# Altium PCB CLK2.PcbDoc
Units mm, origin at the board's own origin, x right, y up, seen from the top; angles counter-clockwise.
Board outline 47.37 x 50.44 mm, 4 copper layers (Top Layer, Internal Plane 1, Internal Plane 2, Bottom Layer), stack 0.677 mm thick; 120 components, 85 nets, 427 pads, 486 vias.
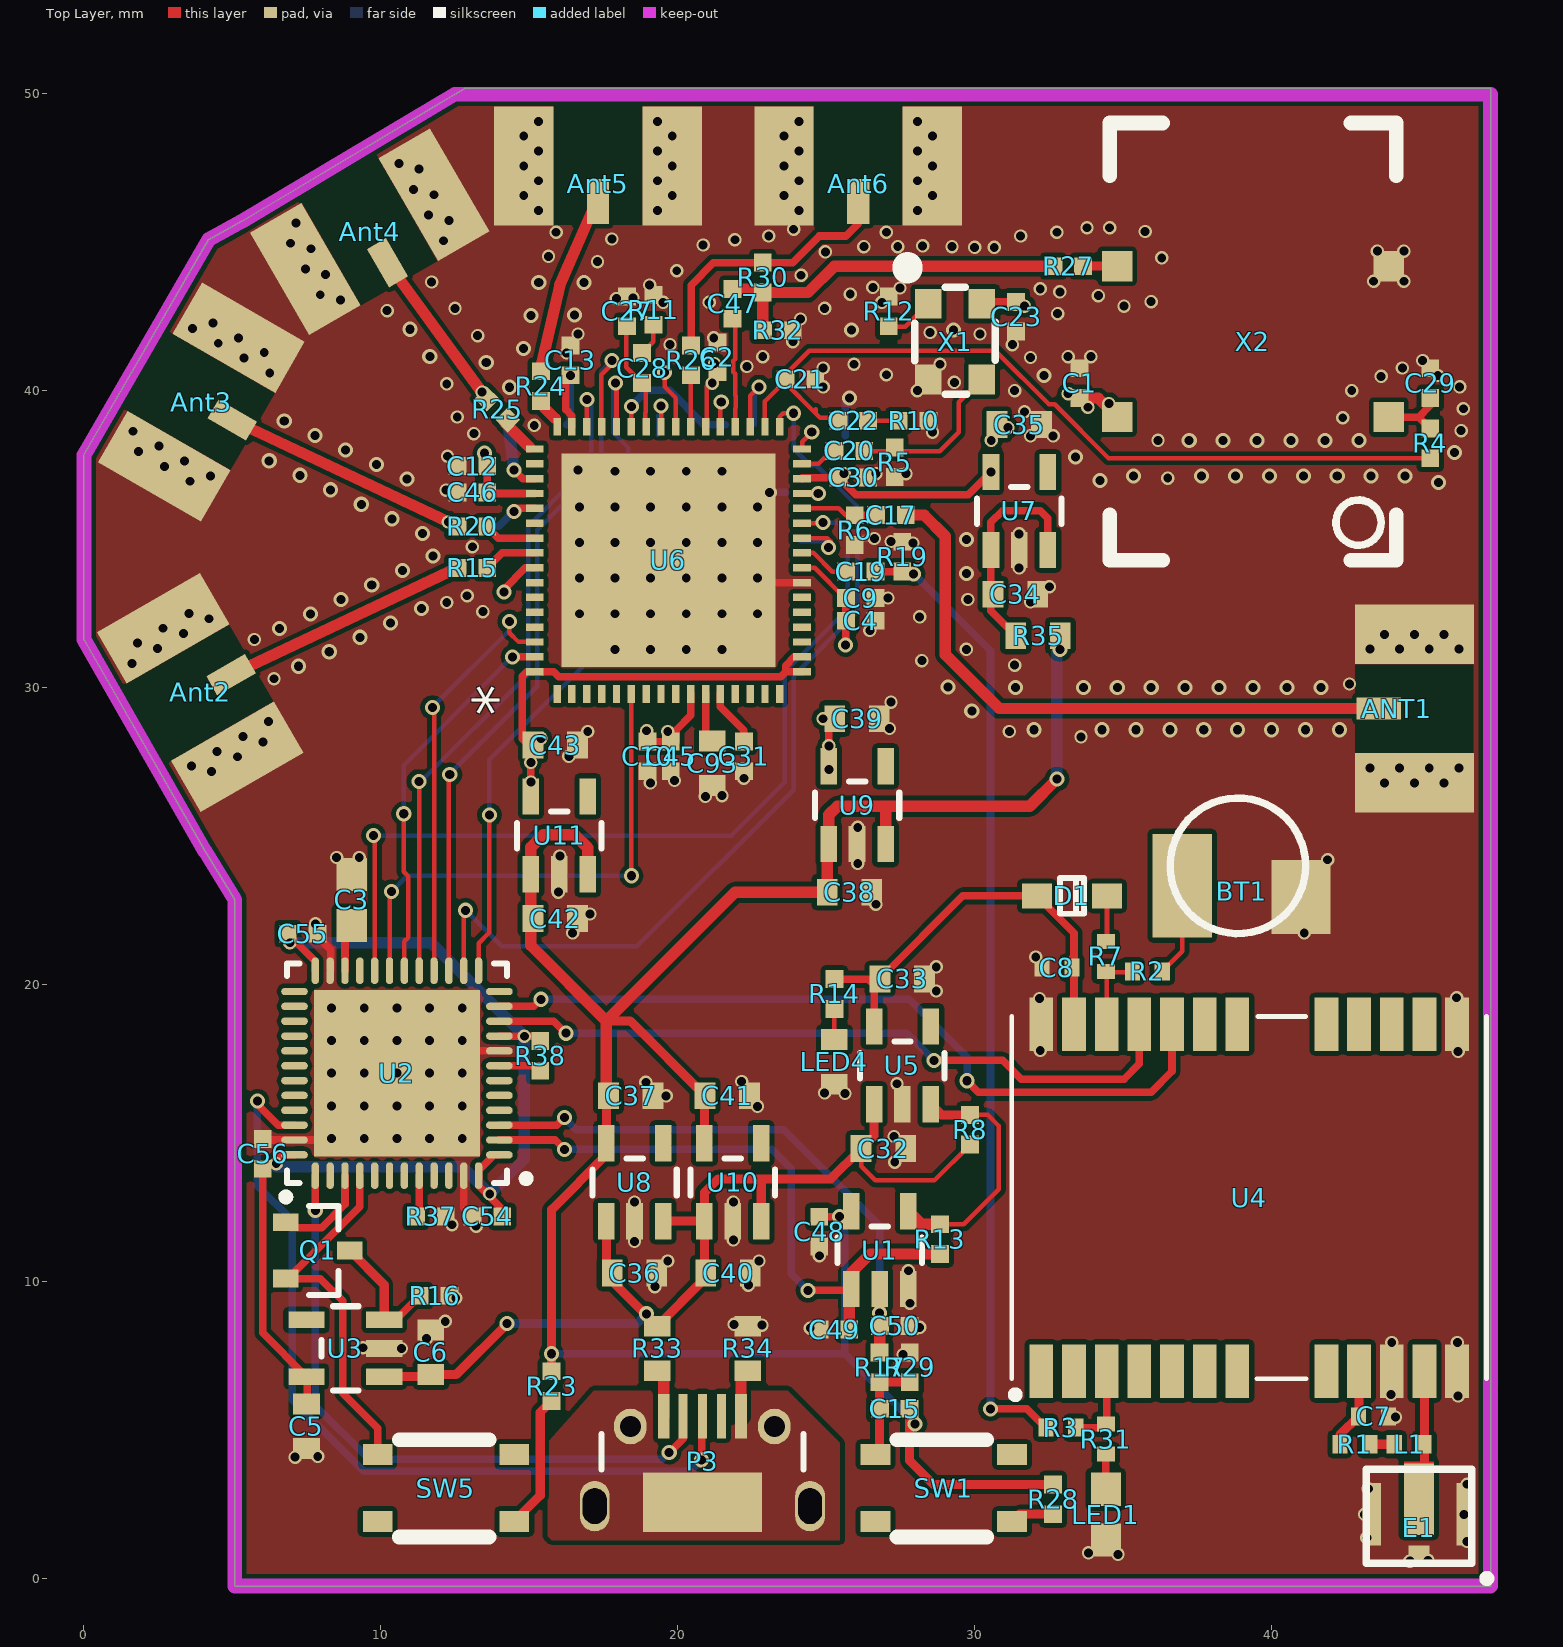
[diagram p0: Top Layer view]
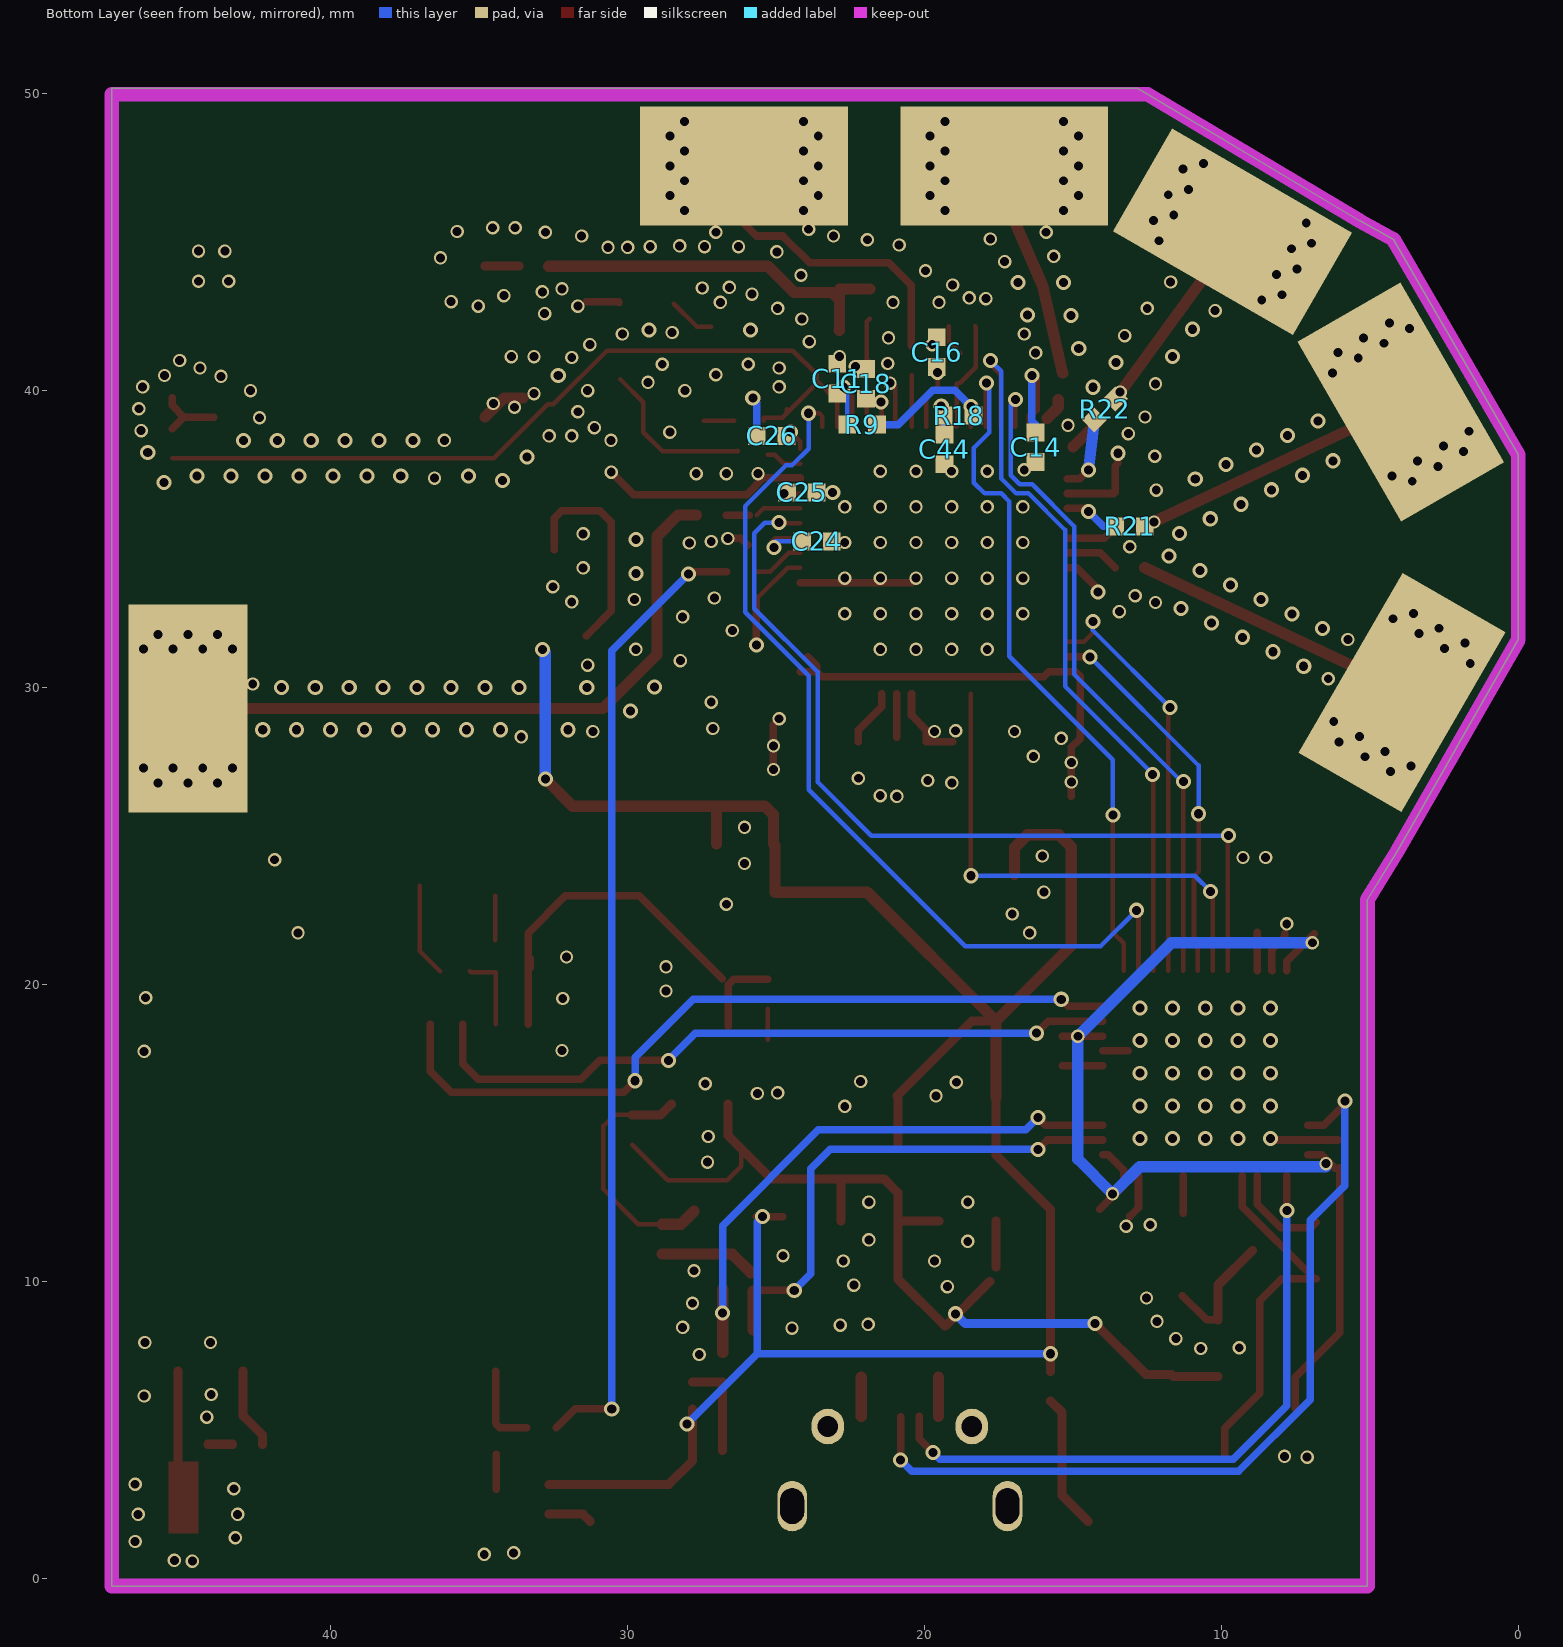
[diagram p1: Bottom Layer view, seen from below]
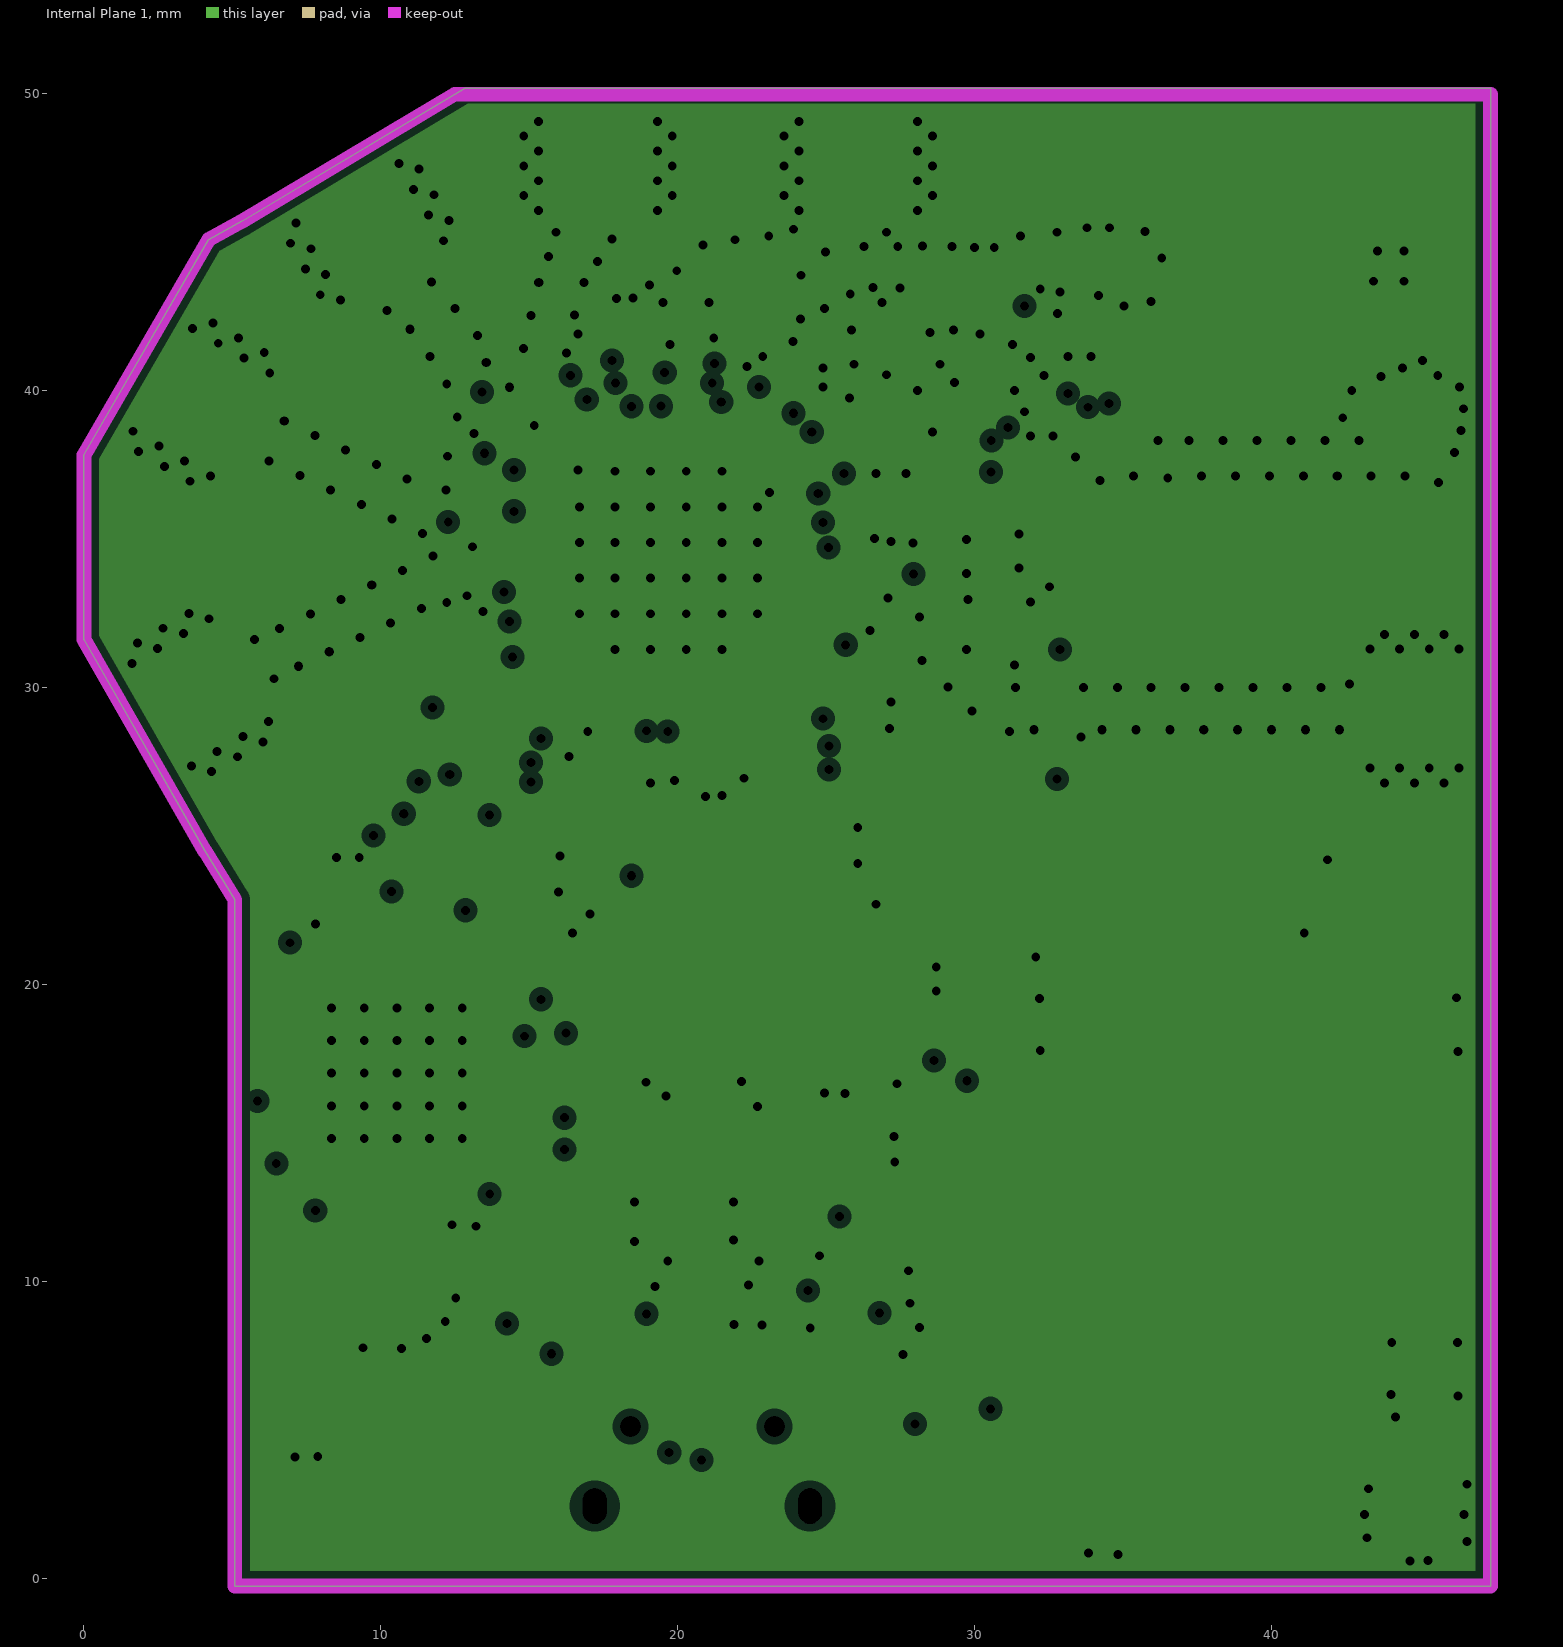
[diagram p2: Internal Plane 1, clearances drawn from the general rule]
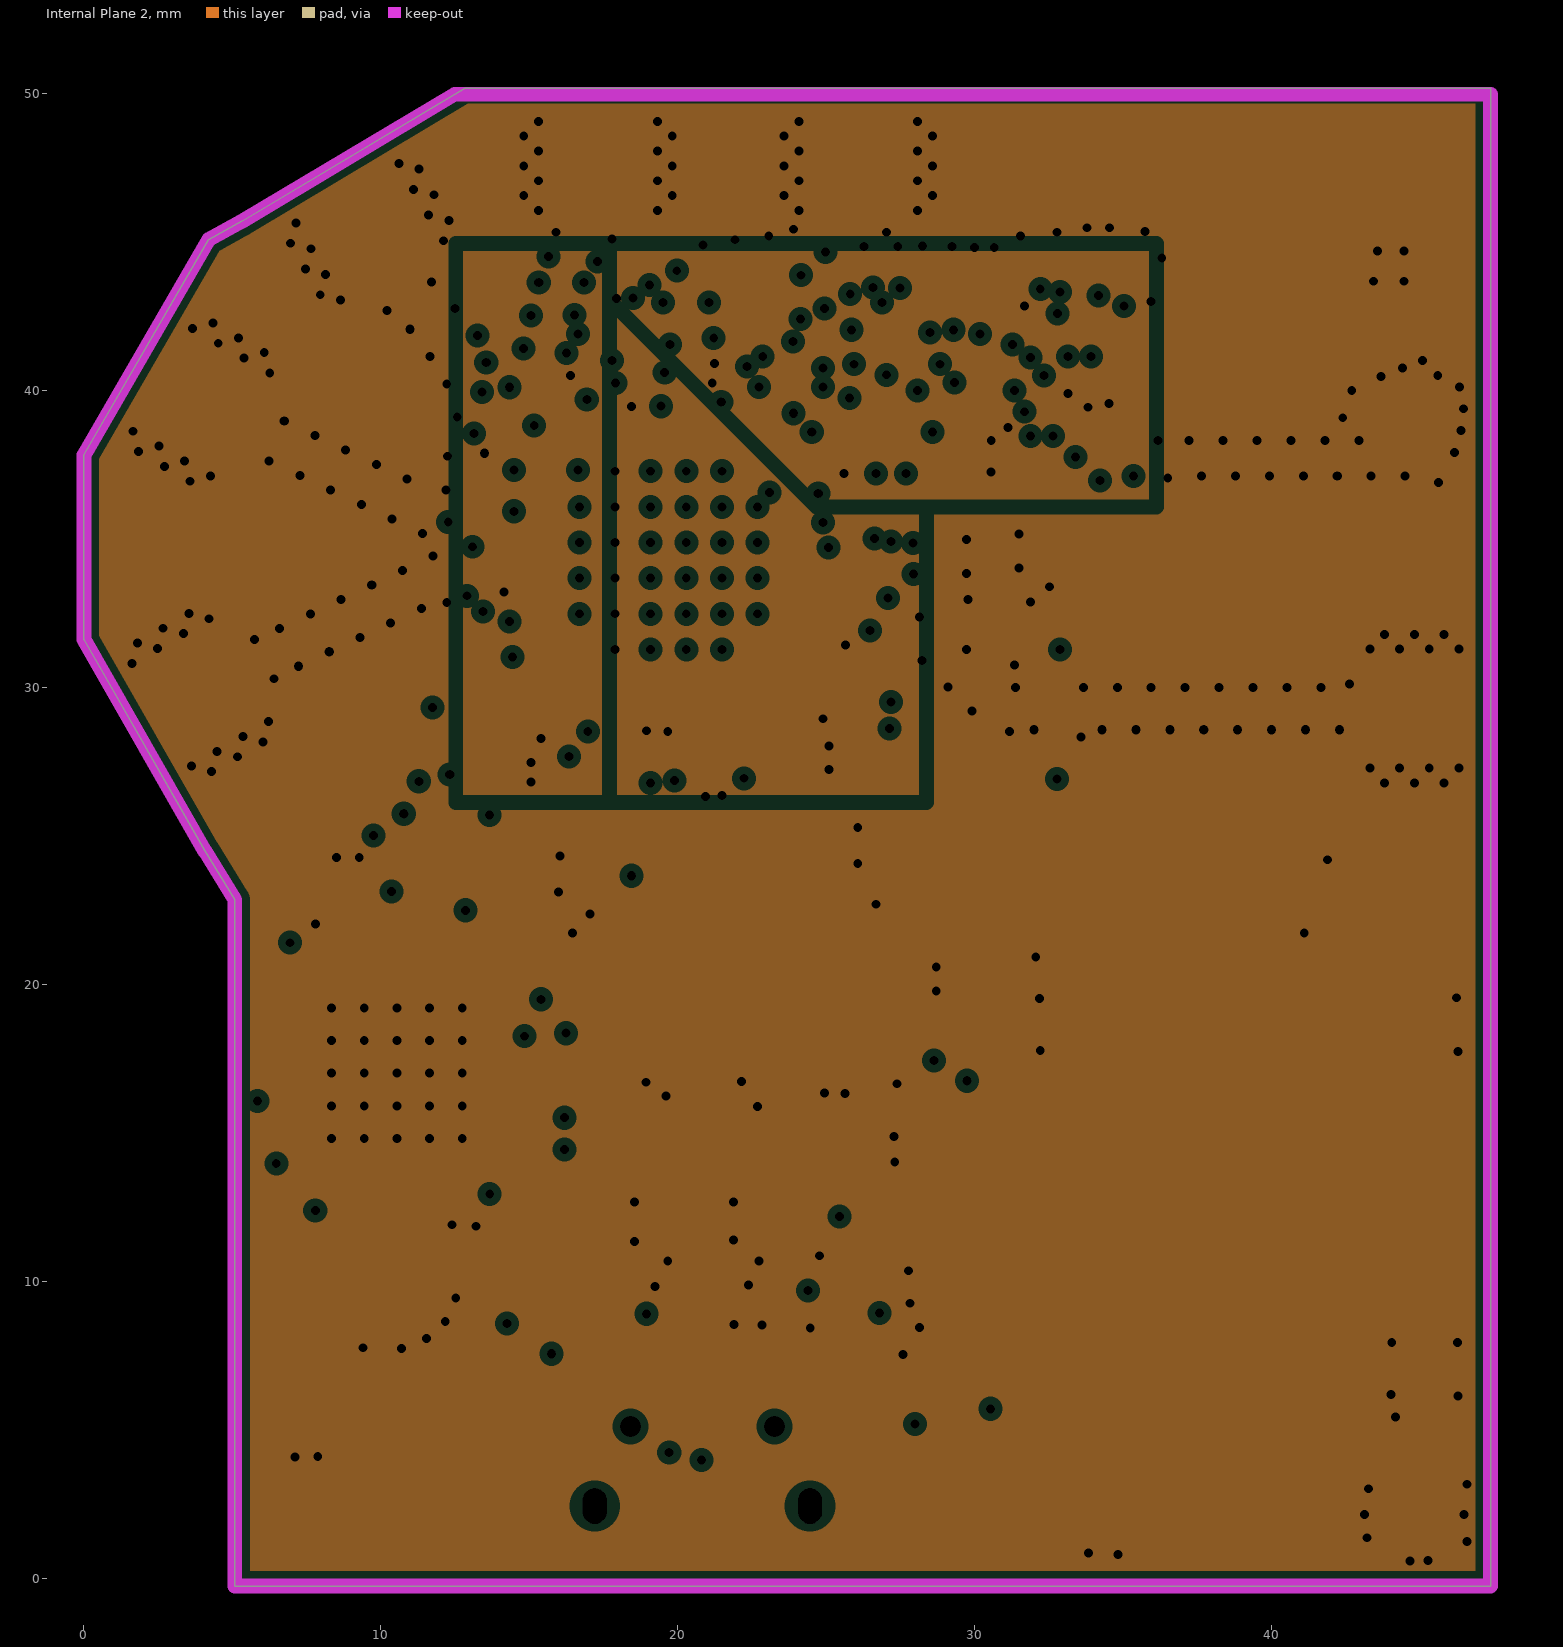
[diagram p3: Internal Plane 2, clearances drawn from the general rule]

## Layer stack, top to bottom
Top Solder: solder mask 0.0102, Solder Resist, Dk 3.5
Top Layer: signal copper 0.0356
Dielectric 1: core 0.1524, FR-4, Dk 4.2
Internal Plane 1: plane copper 0.036, net GND
Dielectric 3: core 0.254, Dk 4.2
Internal Plane 2: plane copper 0.036, net GND
Dielectric 4: prepreg 0.127, Dk 4.2
Bottom Layer: signal copper 0.0356
Bottom Solder: solder mask 0.0102, Solder Resist, Dk 3.5

## Board outline
0,31.623 0,37.846 4.191,45.085 5.334,45.72 12.828,50.19 47.371,50.19 47.371,-0.254 5.08,-0.254 5.08,22.86 4.064,24.511

## Design rules (kind name [scope] priority, off if disabled: settings)
Clearance [All] p1: gap=0.152 ignorepadtopadclearanceinfootprint=FALSE except(0: Arc-Hole Track-Hole SMDPad-Hole THPad-Hole Via-Hole Fill-Hole Poly-Hole Region-Hole Text-Hole)
DiffPairsRouting [All] p1: maxlimit=0.254 minlimit=0.254 mostfreqgap=0.254 toplayer_minwidth=0.152 toplayer_maxwidth=0.381 toplayer_prefwidth=0.381 bottomlayer_minwidth=0.152 bottomlayer_maxwidth=0.381 bottomlayer_prefwidth=0.381 maxuncoupledlength=12.7
MinimumSolderMaskSliver [All] p1 off: minsoldermaskwidth=0.254
PlaneClearance [All] p1: clearance=0.254
PlaneConnect [All] p1: planeconnectstyle=Direct reliefexpansion=0.508 reliefentries=4 reliefconductorwidth=0.254 reliefairgap=0.254
PolygonConnect [All] p1: connectstyle=Direct reliefconductorwidth=0.254 reliefentries=4 polygonreliefangle="90 Angle" airgapwidth=0.254
RoomDefinition PLL1 [InComponentClass('PLL1')] p1 off: confinementstyle=ConfineIn formatcopy=TRUE lockcomponents=FALSE outline 51.181,1.524 87.503,1.524 87.503,14.859 51.181,14.859
RoomDefinition GPS [InComponentClass('GPS')] p2 off: confinementstyle=ConfineIn formatcopy=TRUE lockcomponents=FALSE outline 51.181,1.524 75.819,1.524 75.819,8.636 51.181,8.636
RoomDefinition power [InComponentClass('power')] p3 off: confinementstyle=ConfineIn formatcopy=TRUE lockcomponents=FALSE outline 51.181,44.577 95.377,44.577 95.377,51.562 51.181,51.562
RoomDefinition mcu [InComponentClass('mcu')] p4 off: confinementstyle=ConfineIn formatcopy=TRUE lockcomponents=FALSE outline 103.886,38.1 175.26,38.1 175.26,81.788 103.886,81.788
RoutingVias [All] p1: holewidth=0.305 width=0.508 viastyle="Through Hole" minholewidth=0.305 minwidth=0.508 maxholewidth=0.711 maxwidth=1.27
SilkToBoardRegionClearance [All] p1 off:
SilkToSilkClearance [All] p1 off: silktosilkclearance=0.254
SilkToSolderMaskClearance [IsPad] p1 off: minsilkscreentomaskgap=0.254 clearancetoexposedcopper=TRUE
SolderMaskExpansion [All] p1: expansion=0.102
Width [All] p1: maxlimit=1.524 minlimit=0.152 preferedwidth=0.152
23 further rules are at their usual default settings.

## Classes and differential pairs
component class GPS: BT1 C7 C8 D1 E1 L1 LED1 R1 R2 R3 R7 R31 U4
component class mcu: C3 C54 C55 C56 P3 R33 R34 R37 R38 U2
component class power: C5 C6 C15 C32 C33 C34 C35 C36 C37 C38 C39 C40 C41 C42 C43 C48 C49 C50 LED4 Q1 R8 R13 R14 R16 R17 R23 R28 R29 R35 SW1 SW5 U1 U3 U5 U7 U8 U9 U10 U11
component class PLL1: ANT1 Ant2 Ant3 Ant4 Ant5 Ant6 C1 C2 C4 C9 C10 C11 C12 C13 C14 C16 C17 C18 C19 C20 C21 C22 C23 C24 C25 C26 C27 C28 C29 C30 C31 C44 C45 C46 C47 C93 R4 R5 R6 R9 R10 R11 R12 R15 R18 R19 R20 R21 R22 R24 R25 R26 R27 R30 R32 U6 X1 X2

## Components (designator, comment, footprint, x,y, rotation, side; value= is the part's Value field where it differs from the comment)
ANT1 "Antenna" SMA-2B 44.806,26.797 r90 top
Ant2 "Antenna" SMA-2B 2.667,32.004 r300 top
Ant3 "Antenna" SMA-2B 5.207,41.783 r240 top
Ant4 "Antenna" SMA-2B 11.788,46.601 r210 top
Ant5 "Antenna" SMA-2B 19.812,47.574 r180 top
Ant6 "Antenna" SMA-2B 28.575,47.574 r180 top
BT1 "Battery" XH414H-IV01E 38.862,24.003 r90 top
C1 "0.1uF" 0402#1 33.528,40.259 r90 top
C2 "0.1uF" 0402#1 21.336,41.123 r90 top
C3 "Cap" 0603 9.017,22.86 r270 top value=4.7uF
C4 "0.1uF" 0402#1 26.162,32.258 r0 top
C5 "4.7uF" 0603L 7.493,5.131 r90 top
C6 "4.7uF" 0603L 11.684,7.62 r270 top
C7 "100pF" 0402#2 43.434,5.461 r180 top
C8 "0.1uF" 0402#2 32.766,20.574 r0 top
C9 "0.1uF" 0402#1 26.162,33.02 r0 top
C10 "0.1uF" 0402#1 18.974,27.686 r270 top
C11 "0.1uF" 0402#1 22.936,40.411 r90 bottom
C12 "0.1uF" 0402#1 13.081,37.465 r180 top
C13 "0.1uF" 0402#1 16.383,41.021 r90 top
C14 "0.1uF" 0402#1 16.256,38.1 r270 bottom
C15 "1nF" 0402#1 27.305,5.715 r180 top
C16 "0.1uF" 0402#1 19.583,41.3 r270 bottom
C17 "0.1uF" 0402#1 27.178,35.814 r180 top
C18 "0.1uF" 0402#1 21.971,40.234 r270 bottom
C19 "0.1uF" 0402#1 26.162,33.909 r180 top
C20 "0.1uF" 0402#1 25.781,37.973 r180 top
C21 "0.1uF" 0402#1 24.13,40.386 r0 top
C22 "0.1uF" 0402#1 25.908,38.989 r0 top
C23 "0.1uF" 0402#1 31.394,42.494 r270 top
C24 "0.1uF" 0402#1 23.622,34.925 r180 bottom
C25 "0.1uF" 0402#1 24.13,36.576 r0 bottom
C26 "0.1uF" 0402#1 25.146,38.481 r180 bottom
C27 "0.1uF" 0402#1 18.288,42.672 r90 top
C28 "0.1uF" 0402#1 18.796,40.767 r90 top
C29 "0.1uF" 0402#1 45.339,40.259 r90 top
C30 "0.1uF" 0402#1 25.908,37.084 r0 top
C31 "0.1uF" 0402#1 22.225,27.686 r270 top
C32 "4.7uF" 0603L 26.924,14.478 r180 top
C33 "4.7uF" 0603L 27.559,20.193 r180 top
C34 "4.7uF" 0603L 31.369,33.147 r180 top
C35 "4.7uF" 0603L 31.496,38.862 r180 top
C36 "4.7uF" 0603L 18.542,10.287 r180 top
C37 "4.7uF" 0603L 18.415,16.256 r180 top
C38 "4.7uF" 0603L 25.781,23.114 r180 top
C39 "4.7uF" 0603L 26.035,28.956 r180 top
C40 "4.7uF" 0603L 21.692,10.287 r180 top
C41 "4.7uF" 0603L 21.666,16.256 r180 top
C42 "4.7uF" 0603L 15.875,22.225 r180 top
C43 "4.7uF" 0603L 15.875,28.067 r180 top
C44 "0.1uF" 0402#1 19.329,38.024 r270 bottom
C45 "0.1uF" 0402#1 19.761,27.686 r270 top
C46 "0.1uF" 0402#1 13.081,36.576 r180 top
C47 "0.1uF" 0402#1 21.844,42.926 r90 top
C48 "0.1uF" 0402#1 24.765,11.684 r270 top
C49 "1nF" 0402#1 25.273,8.382 r180 top
C50 "1nF" 0402#1 27.305,8.509 r0 top
C54 "Cap" 0402#1 13.589,12.192 r0 top value=0.1uF
C55 "Cap" 0402#1 7.366,21.717 r180 top value=0.1uF
C56 "Cap" 0402#1 6.02,14.3 r270 top value=0.1uF
C93 "10uF" 0603L 21.158,27.457 r270 top
D1 "Diode" LC-SOD-323 33.274,22.987 r180 top
E1 "Antenna" IPEX 44.958,2.159 r180 top
L1 "10nH" 0402#2 44.628,4.521 r0 top value=10mH
LED1 "LED0" 0603 34.417,2.159 r270 top
LED4 "LED0" 0603L 25.273,17.399 r270 top
P3 "SWD_MicroUSB" MICRO-YZX 20.828,-0.381 r0 top
Q1 "BAT54C" SOT-23B_L 7.874,11.049 r0 top
R1 "33R" 0402#2 42.799,4.521 r0 top
R2 "" 0402#2 35.814,20.447 r180 top value=0R
R3 "50R" 0402#2 32.893,5.08 r0 top
R4 "" 0402#1 45.339,38.227 r90 top value=0R
R5 "" 0402#1 27.305,37.592 r90 top value=0R
R6 "" 0402#1 25.959,35.306 r270 top value=0R
R7 "" 0402#2 34.417,20.955 r270 top value=0R
R8 "" 0402#1 29.845,15.113 r90 top value=0R
R9 "" 0402#1 22.098,38.862 r180 bottom value=0R
R10 "" 0402#1 27.94,38.989 r0 top value=0R
R11 "" 0402#1 19.177,42.723 r90 top value=0R
R12 "" 0402#1 27.102,42.672 r90 top value=0R
R13 "10k" 0402#1 28.829,11.43 r90 top value=47k
R14 "" 0402#1 25.273,19.685 r270 top value=0R
R15 "" 0402#1 13.081,34.036 r180 top value=0R
R16 "" 0402#1 11.811,9.525 r0 top value=0R
R17 "1k" 0402#1 26.797,7.112 r270 top
R18 "FB" 0402#1 18.847,39.167 r180 bottom
R19 "" 0402#1 27.559,34.417 r270 top value=0R
R20 "" 0402#1 13.081,35.433 r180 top value=0R
R21 "" 0402#1 13.081,35.433 r180 bottom value=0R
R22 "" 0402#1 13.919,39.37 r135 bottom value=0R
R23 "1k" 0402#1 15.748,6.477 r90 top value=0Ohm
R24 "" 0402#1 15.392,40.157 r90 top value=0R
R25 "" 0402#1 13.919,39.37 r135 top value=0R
R26 "" 0402#1 20.447,41.021 r90 top value=0R
R27 "" 0402#1 33.147,44.196 r0 top value=0R
R28 "1k" 0402#1 32.639,2.667 r90 top value=0Ohm
R29 "" 0402#1 27.813,7.112 r270 top value=0R
R30 "" 0402#1 22.86,43.815 r270 top value=0R
R31 "" 0402#2 34.417,4.699 r270 top value=0R
R32 "" 0402#1 23.368,42.037 r0 top value=0R
R33 "FB" 0603L 19.304,7.747 r90 top
R34 "FB" 0603L 22.352,7.747 r270 top
R35 "" 0603L 32.131,31.75 r180 top value=0R
R37 "Res2" 0402#1 11.684,12.192 r0 top value=10k
R38 "Res2" 0402#1 15.367,17.602 r270 top value=10k
SW1 "SW-PB" SW3x4 28.956,3.048 r0 top
SW5 "SW-PB" SW3x4 12.192,3.048 r0 top
U1 "74-1G80" SOT23-5 26.797,11.049 r0 top
U2 "STM32F401CCU6" STM-UFQFPN48_N 10.541,17.018 r180 top
U3 "RT9193-33GB" SOT23-5 8.814,7.747 r90 top
U4 "NEO-M8" NEO 39.243,12.827 r270 top
U5 "LP5907" SOT23-5 27.559,17.272 r0 top
U6 "LMK04816" LMK04816 19.685,34.29 r90 top
U7 "LP5907" SOT23-5 31.496,35.941 r0 top
U8 "LP5907" SOT23-5 18.542,13.335 r0 top
U9 "LP5907" SOT23-5 26.035,26.035 r0 top
U10 "LP5907" SOT23-5 21.844,13.335 r0 top
U11 "LP5907" SOT23-5 16.002,25.019 r0 top
X1 "TCXO" TXC_7Q 29.337,41.656 r270 top
X2 "VCXO_14*9" CRYSTEK-9*14 39.37,41.656 r90 top

## Footprints (in the part's own frame and the unit in brackets; to place one, negate y for a bottom-side part, rotate by r counter-clockwise, add the part's x,y. Pads: shape width x height; smd on the part's side, far side on the other; paste and mask are expansions set on the pad)
0402#1 [mm]
  rect 0.6x0.6 smd: 1(-0.5,0) 2(0.5,0)
  body extent -0.51,-0.25 0.51,0.25, height 0.2
0402#2 [mm] "0402-RES"
  rect 0.508x0.61 smd: 1(-0.5,0) 2(0.508,0)
0603 [mil] "0603-RES"
  rect 44x40 smd: 1(-33.46,0) 2(34,0)
  body extent -31,-16 31,16, height 31
0603L [mm]
  rect 0.7x0.9 smd: 1(-0.75,0) 2(0.75,0)
  body extent -0.8,-0.4 0.8,0.4, height 0.8
CRYSTEK-9*14 [mil]
  rect 40x40 smd: 1(-100,-180) 2(100,-180) 3(100,180) 4(-100,180)
  silkscreen extent -290,-190 290,190, body extent -280,-180 280,180, height 210
IPEX [mm]
  rect 1.016x2.413 smd: 1(0,-0.508)
  rect 0.5x2.1 smd: 2(-1.524,0) 2(1.524,0)
  rect 0.7x0.7 smd: 2(0,1.397)
  Top Layer region: -0.508,-1.778 0.508,-1.778 0.508,0.635 -0.508,0.635
  silkscreen extent -2.41,-1.52 1.78,2.29
LC-SOD-323 [mm]
  rect 1x0.83 smd: 1(1.18,0) 2(-1.18,0)
  silkscreen extent -0.4,-0.6 0.4,0.6, body extent -1.35,-0.62 1.35,0.63, height 1.1
LMK04816 [mm]
  rect 7.2x7.2 smd: 0(0,0)
  rect 0.6x0.25 smd: 1(-4.5,3.75) 2(-4.5,3.25) 3(-4.5,2.75) 4(-4.5,2.25) 5(-4.5,1.75) 6(-4.5,1.25) 7(-4.5,0.75) 8(-4.5,0.25) 9(-4.5,-0.25) 10(-4.5,-0.75) 11(-4.5,-1.25) 12(-4.5,-1.75) 13(-4.5,-2.25) 14(-4.5,-2.75) 15(-4.5,-3.25) 16(-4.5,-3.75) 33(4.5,-3.75) 34(4.5,-3.25) 35(4.5,-2.75) 36(4.5,-2.25) 37(4.5,-1.75) 38(4.5,-1.25) 39(4.5,-0.75) 40(4.5,-0.25) 41(4.5,0.25) 42(4.5,0.75) 43(4.5,1.25) 44(4.5,1.75) 45(4.5,2.25) 46(4.5,2.75) 47(4.5,3.25) 48(4.5,3.75)
  rect 0.25x0.6 smd: 17(-3.75,-4.5) 18(-3.25,-4.5) 19(-2.75,-4.5) 20(-2.25,-4.5) 21(-1.75,-4.5) 22(-1.25,-4.5) 23(-0.75,-4.5) 24(-0.25,-4.5) 25(0.25,-4.5) 26(0.75,-4.5) 27(1.25,-4.5) 28(1.75,-4.5) 29(2.25,-4.5) 30(2.75,-4.5) 31(3.25,-4.5) 32(3.75,-4.5) 49(3.75,4.5) 50(3.25,4.5) 51(2.75,4.5) 52(2.25,4.5) 53(1.75,4.5) 54(1.25,4.5) 55(0.75,4.5) 56(0.25,4.5) 57(-0.25,4.5) 58(-0.75,4.5) 59(-1.25,4.5) 60(-1.75,4.5) 61(-2.25,4.5) 62(-2.75,4.5) 63(-3.25,4.5) 64(-3.75,4.5)
  body extent -4.5,-4.5 4.5,4.5, height 0.8
MICRO-YZX [mm]
  rect 0.4x1.5 smd: 1(-1.3,5.85) 5(1.3,5.85)
  rect 0.3x1.5 smd: 2(-0.65,5.85) 3(0,5.85) 4(0.65,5.85)
  oval 1x1.7 hole 0.8 slot 1.2 at 90 deg: 5(-3.625,2.82) 5(3.625,2.82)
  oval 1.1x1.2 hole 0.7: 5(-2.425,5.5) 5(2.425,5.5)
  rect 4x2 smd: 5(0,2.95)
  silkscreen extent -3.4,4.05 3.4,5.25, body extent -4.02,0.33 3.98,5.93, height 2.6
NEO [mm] "u-blox NEO GNSS module"
  rect 1.8x0.8 smd paste-0.1: 1(5.842,-7) 2(5.842,-5.9) 3(5.842,-4.8) 4(5.842,-3.7) 5(5.842,-2.6) 6(5.842,-1.5) 7(5.842,-0.4) 8(5.842,2.6) 9(5.842,3.7) 10(5.842,4.8) 11(5.842,5.9) 12(5.842,7) 13(-5.842,7) 14(-5.842,5.9) 15(-5.842,4.8) 16(-5.842,3.7) 17(-5.842,2.6) 18(-5.842,-0.4) 19(-5.842,-1.5) 20(-5.842,-2.6) 21(-5.842,-3.7) 22(-5.842,-4.8) 23(-5.842,-5.9) 24(-5.842,-7)
  silkscreen extent -6.11,-8 6.69,8, body extent -6.1,-8 6.1,8, height 2.28
SMA-2B [mm]
  rect 0.75x1.5 smd: 1(2.5,1.2)
  rect 2x4 smd: GND(0,0) GND(5,0)
  rect 7x4 smd far side: GND(2.5,0)
  Top Layer pour cut-out: 1,2 4,2 4,-2 1,-2
SOT23-5 [mil] "SOT23-5"
  rect 22x48 smd: 1(-37.4,-51.19) 2(0,-51.19) 3(38,-51.19) 4(38,52) 5(-37.4,52)
  silkscreen extent -56,-17 56,32, body extent -57,-55 57,55, height 47
SOT-23B_L [mm] "SOT23, 3-Leads, Body 2.9x1.3mm, Pitch 0.95mm, Lead Span 2.4mm, IPC High Density"
  rect 0.85x0.6 smd: 1(-1.075,0.95) 2(-1.075,-0.95) 3(1.075,0)
  silkscreen extent -1.2,-1.5 0.7,1.92, body extent -0.7,-1.5 0.7,1.5, height 1.14
STM-UFQFPN48_N [mm] "QFN, 48-Leads, Body 7.1x7.1mm, Pitch 0.5mm, Thermal Pad 5.6x5.6mm, IPC Medium Density"
  oval 0.9x0.25 smd: 1(-3.45,2.75) 2(-3.45,2.25) 3(-3.45,1.75) 4(-3.45,1.25) 5(-3.45,0.75) 6(-3.45,0.25) 7(-3.45,-0.25) 8(-3.45,-0.75) 9(-3.45,-1.25) 10(-3.45,-1.75) 11(-3.45,-2.25) 12(-3.45,-2.75) 25(3.45,-2.75) 26(3.45,-2.25) 27(3.45,-1.75) 28(3.45,-1.25) 29(3.45,-0.75) 30(3.45,-0.25) 31(3.45,0.25) 32(3.45,0.75) 33(3.45,1.25) 34(3.45,1.75) 35(3.45,2.25) 36(3.45,2.75)
  oval 0.25x0.9 smd: 13(-2.75,-3.45) 14(-2.25,-3.45) 15(-1.75,-3.45) 16(-1.25,-3.45) 17(-0.75,-3.45) 18(-0.25,-3.45) 19(0.25,-3.45) 20(0.75,-3.45) 21(1.25,-3.45) 22(1.75,-3.45) 23(2.25,-3.45) 24(2.75,-3.45) 37(2.75,3.45) 38(2.25,3.45) 39(1.75,3.45) 40(1.25,3.45) 41(0.75,3.45) 42(0.25,3.45) 43(-0.25,3.45) 44(-0.75,3.45) 45(-1.25,3.45) 46(-1.75,3.45) 47(-2.25,3.45) 48(-2.75,3.45)
  rect 5.6x5.6 smd: 49(0,0)
  silkscreen extent -4.48,-3.7 3.7,3.7, body extent -3.55,-3.55 3.55,3.55, height 0.6
SW3x4 [mm]
  rect 1x0.7 smd: 1(-2.3,1.125) 2(2.3,-1.125) 3(2.3,1.125) 4(-2.3,-1.125)
  silkscreen extent -1.58,-1.65 1.45,1.63, body extent -2,-1.5 2,1.5, height 2.6
TXC_7Q [mm]
  rect 1x0.9 smd: 1(-1.275,-0.9) 2(1.275,-0.9) 3(1.275,0.9) 4(-1.275,0.9)
  silkscreen extent -2.52,-1.6 1.78,1.35
XH414H-IV01E [mm]
  rect 3.5x2 smd: 1(-0.671,1.873)
  rect 2.5x2 smd: 2(-1.052,-2.127)
  silkscreen extent -2.28,-2.28 2.28,2.28, body extent -2.42,-2.4 2.36,2.4, height 2

## Part data
BT1: "Multicell Battery", LatestRevisionDate=17-Jul-2002, LatestRevisionNote="Re-released for DXP Platform.", PackageDescription="Battery; 2 Leads", PackageReference=BAT-2, Published=24-Mar-1999, Publisher="Altium Limited"
C1 C2 C4 C9 C10 C11 C12 C13 C14 C15 C16 C17 C18 C19 C20 C21 C22 C23 C24 C25 C26 C27 C28 C29 C30 C31 C44 C45 C46 C47 C48 C49 C50 C93: library part CAP0402-CAP, "<b>Capacitor</b> / Standard 0603 ceramic capacitor, and 0.1\" leaded capacitor.", PARTNO=CC0402ZRY5V7BB104
C3 C54 C55 C56: "Capacitor", LatestRevisionDate=17-Jul-2002, LatestRevisionNote="Re-released for DXP Platform.", PackageDescription="Radial Cap, Thru-Hole; 2 Leads; 0.3 in Pin Spacing", PackageReference=RAD-0.3, Published=8-Jun-2000, Publisher="Altium Limited"
C5 C6 C7 C8 C32 C33 C34 C35 C36 C37 C38 C39 C40 C41 C42 C43: library part Cap, "Capacitor", LatestRevisionDate=17-Jul-2002, LatestRevisionNote="Re-released for DXP Platform.", PackageDescription="Radial Cap, Thru-Hole; 2 Leads; 0.3 in Pin Spacing", PackageReference=RAD-0.3, Published=8-Jun-2000, Publisher="Altium Limited"
D1: "Default Diode", Code_JEDEC=DO-214-AB, LatestRevisionDate=17-Jul-2002, LatestRevisionNote="Re-released for DXP Platform.", PackageDescription="DO-214-AB/SMC; 2 C-Bend Leads; Body 7.9 x 5.9 mm, inc. leads (LxW)", PackageReference=SMC, PackageVersion=Sep-1996, Published=8-Jun-2000, Publisher="Altium Limited"
E1: "Generic Antenna", LatestRevisionDate=17-Jul-2002, LatestRevisionNote="Re-released for DXP Platform.", PackageReference=PIN1, Published=24-Mar-1999, Publisher="Altium Limited"
L1: library part Inductor, "Inductor", Code_IEC=1005, Code_JEITA=0402, LatestRevisionDate=29-May-2009, LatestRevisionNote="IPC-7351 Footprint Added.", PackageDescription="Chip Inductor", PackageReference=0402-A, Published=8-Jun-2000, Publisher="Altium Limited"
LED1 LED4: "Typical INFRARED GaAs LED", LatestRevisionDate=08-Jul-2005, LatestRevisionNote="Mech Layer 1 removed.", PackageDescription="LED; 2 Leads", PackageReference=LED-0, Published=8-Jun-2000, Publisher="Altium Limited"
P3: "Connector SMD USB Micro Type B middle mount", Manufacturer 1="Molex Inc", Package / Case=SMD, Supplier Part Number 1=WM17142CT-ND, SCDType=undef, Supplier 1=Digi-Key
R1 R2 R3 R4 R5 R6 R7 R8 R9 R10 R11 R12 R13 R14 R15 R16 R17 R18 R19 R20 R21 R22 R23 R24 R25 R26 R27 R28 R29 R30 R31 R32 R33 R34 R35: library part Res2, "Resistor", LatestRevisionDate=17-Jul-2002, LatestRevisionNote="Re-released for DXP Platform.", PackageDescription="Axial Device, Thru-Hole; 2 Leads; 0.4 in Pin Spacing", PackageReference=AXIAL-0.4, Published=8-Jun-2000, Publisher="Altium Limited"
R37 R38: "Resistor", LatestRevisionDate=17-Jul-2002, LatestRevisionNote="Re-released for DXP Platform.", PackageDescription="Axial Device, Thru-Hole; 2 Leads; 0.4 in Pin Spacing", PackageReference=AXIAL-0.4, Published=8-Jun-2000, Publisher="Altium Limited"
SW1 SW5: "Switch", LatestRevisionDate=17-Jul-2002, LatestRevisionNote="Re-released for DXP Platform.", PackageDescription="Switch; 2 Leads", PackageReference=SPST-2, Published=24-Mar-1999, Publisher="Altium Limited"
U2: "ARM Cortex-M4 32-bit MCU+FPU, 105 DMIPS, 256 kB Flash, 64 kB Internal RAM, 36 I/Os, 48-pin UFQFPN, -40 to 85 degC, Tray", I/Os (High Current)=36, Manufacturer=STMicroelectronics, Operating Frequency(F) (Processor speed) (MHz)=84, Supplier Part Number 1=19X6217, Supply Voltage(Vcc) max (V)=3.6, Supply Voltage(Vcc) min (V)=1.8, ComponentLink1Description="Manufacturer URL", ComponentLink1URL=http://www.st.com/web/en/home.html, ComponentLink2Description=Datasheet, ComponentLink2URL=http://www.st.com/st-web-ui/static/active/en/resource/technical/document/data_brief/DM00071938.pdf, ComponentLink3Description="Package Specification", ComponentLink3URL=http://www.st.com/st-web-ui/static/active/en/resource/technical/document/data_brief/DM00071938.pdf, Core="ARM Cortex-M4", DatasheetVersion="Rev. 1", FLASH Size (Prog) (kB)=256, Internal RAM Size (kB)=64, Mounting Technology="Surface Mount", PackageDescription="48-Pin Ultra Thin Fine Pitch Quad Flat No-Lead, 7 x 7 x 0.6 mm Body, 0.5 mm Pitch, Exposed Pad", PackageReference=UFQFPN48, PackageVersion="Rev. 1, 04/2013", Packing=Tray, PartNumber=STM32F401CCU6, Supplier 1=Newark, Supplier 2=Mouser, Supplier Part Number 2=511-STM32F401CCU6
U3: library part LP5907
U4: library part NEO, "u-blox NEO GNSS module", Manufacturer=u-blox, Part Description="u-blox GNSS module"
X1 X2: library part OSC_40M

## Via types
v1: diameter 0.45, hole 0.3, Top Layer to Bottom Layer, 334 vias
v2: diameter 0.508, hole 0.305, Top Layer to Bottom Layer, 127 vias
v3: diameter 0.5, hole 0.3, Top Layer to Bottom Layer, 25 vias

## Nets (pads, with @x,y where several pads share a name; then routed paths per layer and width w, separated by ;. In a path a pad name is that pad's centre, name@x,y a point inside that pad or via, vN(x,y) a via of type N, cw(c..) or ccw(c..) an arc to the next point about the centre after c; other vN are vias at no path point)
3.3CLKOUT: C12.1 C13.1 C14.1 C43.2 C46.1 U6.17 U6.18 U6.47 U6.52 U6.57 U6.64 U11.5 | length 22.4
  Top Layer w0.254: v2(13.487,37.897) 13.487,37.559 C12.1 C46.1 13.617,36.54 U6.52 ; v2(14.148,33.223) 14.148,33.323 14.865,34.04 U6.57 ; U11.5 15.052,27.994 14.757,28.289 14.757,30.378 14.919,30.54 U6.64 15.815,30.54 15.986,30.369 23.461,30.369 23.631,30.54 ; v2(16.383,40.521) 16.231,40.369 16.231,39.37 16.435,39.166 U6.47 ; U6.18@23.928,31.04 23.631,30.743 23.631,30.54 ; U6.17 23.631,30.54
  Bottom Layer w0.254: C14.1@16.256,38.854 16.383,38.981 v2(16.383,40.521)
  other v1: 15.052,26.822 15.052,27.483 15.392,28.296
3.3D: C5.2 C54.2 C55.2 C56.2 R38.1 U2.1 U2.9 U2.24 U2.36 U2.48 U3.5 | length 37.9
  Top Layer w0.254: C56.2@6.02,13.826 6.02,8.27 U3.5 7.518,6.772 C5.2@7.518,5.728 ; C56.2@6.18,13.826 6.623,14.268 U2.36 ; C55.2 7.791,20.792 U2.24 ; U2.1 13.811,14.268 13.291,13.748 U2.48 13.291,13.227 C54.2@14.089,12.429 ; U2.9 R38.1@15.355,18.268
  Bottom Layer w0.381: v1@6.477,13.868 12.751,13.868 v1(13.665,12.954) 14.834,14.122 v1(14.834,18.263) 11.684,21.412 v1(6.934,21.412)
  other v1: 6.477,13.97
3.3GPS: C8.2 C33.2 D1.1 R14.1 U4.23 U5.5 | length 14.4
  Top Layer w0.254: R14.1 26.417,20.185 26.609,19.993 U5.5 ; C33.2 29.603,22.987 D1.1 33.343,21.738 U4.23 ; C8.2 33.274,20.879
3.3PLL: C4.1 C9.1 C10.1 C39.2 C45.1 R9.2 R18.2 U6.10 U6.24 U6.43 U9.5 | length 12.2
  Top Layer w0.152: U6.43 v2(18.435,39.477) ; U6.24 24.608,34.04 25.628,33.02 C9.1
  Top Layer w0.254: C10.1@19.05,28.186 C45.1 19.939,28.186 19.939,28.575 20.435,29.071 U6.10 ; v1(25.085,27.244) U9.5 C39.2@25.085,28.756 ; v2(25.654,31.445) 25.662,31.453 C4.1 C9.1
  Bottom Layer w0.254: v2(18.435,39.477) 18.972,40.014 19.727,40.014 20.879,38.862 R9.2
  other v1: 25.085,28.042 19.66,28.524 18.948,28.55 24.892,28.956
3.3VCXO: C1.1 C2.1 C23.1 C30.1 C35.2 U6.30 U6.38 U7.5 X1.4 X2.4 | length 11.6
  Top Layer w0.152: U6.38 20.976,38.831 20.976,40.161 C2.1@21.336,40.521 ; X1.4 X1.4@30.323,42.931
  Top Layer w0.254: U6.30 24.185,37.073 25.397,37.073 C30.1 25.987,36.505 29.789,36.505 v1(30.546,37.262) ; X1.4@30.3,42.994 C23.1
  Top Layer w0.381: C1.1 34.155,39.759 X2.4
  other v1: 25.603,37.211 30.556,38.329 31.115,38.76 33.807,39.446 34.519,39.573 33.147,39.903 21.158,40.259 21.234,40.919 31.674,42.85
3.8: C15.1 C37.2 C38.2 C41.2 C42.2 C48.1 R23.2 R28.2 R35.1 U1.5 U8.5 U9.1 U9.3 U10.5 U11.1 U11.3 | length 80
  Top Layer w0.254: C48.1 U1.5@25.661,12.184
  Top Layer w0.305: R23.2 v2(15.748,7.569) 15.748,12.421 17.592,14.265 U8.5 C37.2@17.592,16.183 ; 17.592,18.781 18.391,18.781 C41.2 ; U10.5 C41.2@20.894,16.234 ; C15.1 27.805,3.97 28.608,3.167 R28.2
  Top Layer w0.381: U11.3 16.967,24.613 16.535,25.044 15.469,25.044 15.052,24.628 U11.1 15.052,21.321 17.592,18.781 ; C37.2@17.592,16.183 17.592,18.781 ; U9.3 27,25.933 ; v2(32.766,26.924) 31.852,26.01 25.375,26.01 25.085,25.72 U9.1 25.031,24.681 C38.2 21.925,23.114 17.592,18.781
  Bottom Layer w0.254: v2(15.748,7.569) 25.629,7.569 ; v2(25.451,12.192) 25.629,12.014 25.629,7.569 ; v2(27.991,5.207) 25.629,7.569
  Bottom Layer w0.381: v2(32.766,26.924) 32.766,31.191 v2(32.868,31.293)
5V: C6.2 C32.2 C36.2 C40.2 R8.1 R33.2 U3.1 U5.1 U8.1 U8.3 U10.1 U10.3 | length 33.8
  Top Layer w0.152: C32.2 26.174,13.882 26.645,13.411 28.643,13.411 R8.1
  Top Layer w0.305: U3.1 C6.2@11.611,6.797 ; C6.2 12.534,6.87 v2(14.249,8.585) ; C36.2@17.592,10.487 U8.1 ; C36.2@17.792,10.009 R33.2 20.894,10.087 U10.1 ; U8.3 U10.1 ; U10.3 22.809,13.437 ; U5.1 26.609,14.913 C32.2 25.158,13.462 21.361,13.462 20.894,12.995 U10.1
  Bottom Layer w0.305: v2(14.249,8.585) 18.618,8.585 v2(18.948,8.915)
GND: ANT1.GND Ant2.GND Ant3.GND Ant4.GND Ant5.GND Ant6.GND BT1.2 C1.2 C2.2 C3.1 C4.2 C5.1 C6.1 C7.1 C8.1 C9.2 C10.2 C11.2 C12.2 C13.2 C14.2 C16.1 C18.1 C21.2 C23.2 C24.2 C25.1 C26.1 C27.2 C29.2 C30.2 C31.2 C32.1 C33.1 C34.1 C35.1 C36.1 C37.1 C38.1 C39.1 C40.1 C41.1 C42.1 C43.1 C44.2 C45.2 C46.2 C48.2 C49.2 C50.2 C54.1 C55.1 C56.1 C93.2 E1.2 LED1.2 LED4.2 R5.1 R6.2 R10.2 R11.2 R12.2 R16.2 R19.1 R29.1 R32.2 R34.1 R37.2 U1.3 U2.8 U2.23 U2.35 U2.47 U2.49 U3.2 U4.10 U4.12 U4.13 U4.24 U5.2 U6.0 U6.23 U7.2 U8.2 U9.2 U10.2 U11.2 X1.2 X2.2 | length 12.4
  Top Layer w0.254: C56.1@6.077,14.768 U2.35 U2.49@8.291,14.768 ; C55.1 7.866,21.609 8.306,21.169 8.306,20.483 U2.23 ; U2.47 12.791,12.49 C54.1 ; U2.49@13.141,17.768 U2.8 ; U6.0@20.435,33.54 U6.23 ; R6.2 26.179,35.027 v1(26.619,35.027)
  Bottom Layer w0.254: v2(23.089,36.576) C25.1 ; C26.1 25.646,39.616 v2(25.781,39.751)
  other v1: 44.653,0.584 45.263,0.61 34.823,0.813 33.833,0.864 46.584,1.245 43.205,1.372 43.129,2.159 46.482,2.159 43.256,3.023 46.584,3.175 7.112,4.089 7.874,4.115 44.171,5.436 46.279,6.147 44.018,6.198 27.584,7.544 10.693,7.747 9.398,7.772 44.044,7.95 46.253,7.95 11.532,8.077 24.46,8.433 28.143,8.458 22.835,8.534 21.895,8.56 12.167,8.661 27.813,9.271 12.522,9.449 19.228,9.83 22.377,9.881 27.762,10.363 19.66,10.693 22.733,10.693 24.765,10.871 18.542,11.354 21.869,11.405 13.208,11.862 12.395,11.913 18.542,12.675 21.869,12.675 27.305,14.021 27.28,14.884 22.682,15.9 19.609,16.256 25.629,16.332 24.943,16.358 27.381,16.662 18.923,16.713 22.149,16.739 46.279,17.755 32.207,17.78 32.182,19.533 46.228,19.558 28.702,19.787 28.702,20.599 32.055,20.93 16.459,21.742 41.097,21.742 7.798,22.047 17.043,22.377 26.67,22.708 15.977,23.114 26.06,24.079 41.885,24.206 8.509,24.282 9.271,24.282 16.027,24.333 26.06,25.298 20.93,26.34 21.488,26.365 19.075,26.797 43.806,26.797 44.806,26.797 45.806,26.797 19.888,26.873 22.225,26.949 4.301,27.174 43.306,27.297 44.306,27.297 45.306,27.297 46.306,27.297 3.618,27.357 5.167,27.674 16.332,27.686 4.484,27.857 6.033,28.174 5.35,28.357 33.579,28.346 16.967,28.524 31.166,28.524 27.127,28.626 6.216,28.857 27.178,29.515 42.621,30.124 6.401,30.302 31.344,30.759 1.618,30.821 28.219,30.912 17.885,31.29 19.085,31.29 20.285,31.29 21.485,31.29 29.718,31.293 43.306,31.297 44.306,31.297 45.306,31.297 46.306,31.297 2.484,31.321 1.801,31.504 5.74,31.623 43.806,31.797 44.806,31.797 45.806,31.797 3.35,31.821 26.467,31.928 2.667,32.004 4.216,32.321 28.143,32.385 16.685,32.49 17.885,32.49 19.085,32.49 20.285,32.49 21.485,32.49 22.685,32.49 3.533,32.504 13.437,32.563 12.217,32.868 31.877,32.893 29.769,32.969 27.076,33.02 12.903,33.096 32.512,33.401 16.685,33.69 17.885,33.69 19.085,33.69 20.285,33.69 21.485,33.69 22.685,33.69 31.496,34.036 13.081,34.747 27.915,34.874 16.685,34.89 17.885,34.89 19.085,34.89 20.285,34.89 21.485,34.89 22.685,34.89 27.178,34.925 31.496,35.179 16.685,36.09 17.885,36.09 19.085,36.09 20.285,36.09 21.485,36.09 22.685,36.09 12.192,36.652 3.573,36.953 36.5,37.059 4.256,37.136 26.67,37.211 27.686,37.211 17.885,37.29 19.085,37.29 20.285,37.29 21.485,37.29 16.637,37.338 2.707,37.453 3.39,37.636 12.243,37.795 1.841,37.953 2.524,38.136 36.17,38.329 31.877,38.481 32.639,38.481 13.132,38.557 28.575,38.608 1.658,38.636 46.38,38.659 15.164,38.837 42.393,39.091 12.573,39.116 31.674,39.294 46.457,39.395 28.067,40.005 31.344,40.005 42.697,40.005 24.892,40.132 46.33,40.132 12.217,40.234 29.312,40.284 43.688,40.488 45.593,40.513 27.026,40.538 6.256,40.6 24.892,40.767 44.399,40.767 22.327,40.818 25.933,40.894 28.829,40.894 45.085,41.021 5.39,41.1 31.877,41.123 22.86,41.148 33.147,41.148 33.909,41.148 6.073,41.283 16.256,41.275 19.736,41.554 31.267,41.554 4.524,41.6 23.876,41.656 5.207,41.783 21.209,41.783 13.259,41.859 16.637,41.91 30.175,41.91 28.499,41.961 3.658,42.1 4.341,42.283 24.13,42.418 32.791,42.596 10.211,42.697 12.497,42.774 24.943,42.774 35.027,42.85 19.507,42.977 21.057,42.977 26.873,42.977 35.941,43.002 8.641,43.052 17.932,43.104 18.491,43.129 34.163,43.205 7.958,43.235 25.806,43.256 32.868,43.332 32.207,43.434 27.483,43.459 26.568,43.485 19.05,43.561 11.709,43.663 43.434,43.688 44.45,43.688 24.155,43.891 8.141,43.918 19.964,44.044 7.458,44.101 17.297,44.348 36.297,44.475 15.646,44.526 24.968,44.679 43.561,44.704 44.45,44.704 7.641,44.784 29.997,44.831 30.658,44.831 26.264,44.856 27.407,44.856 29.235,44.856 28.245,44.882 20.853,44.907 6.958,44.967 12.105,45.052 21.92,45.085 17.78,45.11 23.063,45.212 31.547,45.212 15.9,45.339 27.026,45.339 32.766,45.339 35.738,45.364 23.901,45.441 33.782,45.491 34.544,45.491 7.141,45.65 12.288,45.735 11.605,45.918 15.312,46.074 19.312,46.074 24.075,46.074 28.075,46.074 14.812,46.574 19.812,46.574 23.575,46.574 28.575,46.574 11.788,46.601 11.105,46.784 15.312,47.074 19.312,47.074 24.075,47.074 28.075,47.074 11.288,47.467 14.812,47.574 19.812,47.574 23.575,47.574 28.575,47.574 10.605,47.65 15.312,48.074 19.312,48.074 24.075,48.074 28.075,48.074 14.812,48.574 19.812,48.574 23.575,48.574 28.575,48.574 15.312,49.074 19.312,49.074 24.075,49.074 28.075,49.074
  other v2: 31.998,28.585 34.284,28.585 35.427,28.585 36.57,28.585 37.713,28.585 38.856,28.585 39.999,28.585 41.142,28.585 42.285,28.585 29.9,29.214 31.371,30.009 33.657,30.009 34.8,30.009 35.943,30.009 37.086,30.009 38.229,30.009 39.372,30.009 40.515,30.009 41.658,30.009 29.092,30.022 7.227,30.723 8.261,31.21 9.294,31.698 6.591,31.998 10.328,32.186 7.625,32.485 11.362,32.673 8.658,32.973 9.692,33.461 29.719,33.849 10.726,33.948 11.76,34.436 29.719,34.992 11.407,35.2 10.373,35.689 9.34,36.177 8.306,36.666 45.616,36.909 34.216,36.978 10.879,37.025 35.35,37.127 37.636,37.127 38.779,37.127 39.922,37.127 41.065,37.127 42.208,37.127 43.351,37.127 44.494,37.127 7.273,37.154 9.846,37.513 6.24,37.642 33.388,37.766 46.157,37.916 8.813,38.002 37.223,38.327 38.366,38.327 39.509,38.327 40.652,38.327 41.795,38.327 42.938,38.327 7.779,38.49 6.746,38.979 14.326,40.12 32.332,40.519 13.548,40.957 11.647,41.148 14.803,41.418 10.974,42.072 25.853,42.053 29.282,42.053 15.06,42.532 16.526,42.554 15.316,43.646 16.844,43.652
  other v3: 8.341,14.818 9.441,14.818 10.541,14.818 11.641,14.818 12.741,14.818 8.341,15.918 9.441,15.918 10.541,15.918 11.641,15.918 12.741,15.918 8.341,17.018 9.441,17.018 10.541,17.018 11.641,17.018 12.741,17.018 8.341,18.118 9.441,18.118 10.541,18.118 11.641,18.118 12.741,18.118 8.341,19.218 9.441,19.218 10.541,19.218 11.641,19.218 12.741,19.218
LED: U2.27
LED1: U2.28
NetANT1_1: ANT1.1 C17.1 | length 21.2
  Top Layer w0.381: C17.1 28.296,35.814 29.007,35.103 29.007,31.115 30.825,29.297 ANT1.1@43.885,29.297
NetAnt2_1: Ant2.1 R15.2 | length 8.4
  Top Layer w0.381: Ant2.1 R15.2
NetAnt3_1: Ant3.1 R20.2 R21.2 | length 8.4
  Top Layer w0.381: Ant3.1 6.25,38.425 R20.2
  other v1: 12.268,35.581
NetAnt4_1: Ant4.1 R22.2 R25.2 | length 5.7
  Top Layer w0.381: Ant4.1 R25.2
  other v1: 13.411,39.954
NetAnt5_1: Ant5.1 R24.2 | length 6.2
  Top Layer w0.381: R24.2@15.346,40.599 16.027,43.561 Ant5.1@17.312,46.501
NetAnt6_1: Ant6.1 R26.2 R30.1 | length 9.6
  Top Layer w0.254: R26.2 20.447,43.561 21.201,44.315 R30.1 23.868,44.315 24.765,45.212 25.654,45.212 26.075,45.633 Ant6.1@26.075,46.679
NetBT1_1: BT1.1 R2.1 | length 3.2
  Top Layer w0.152: R2.1 36.989,21.122 BT1.1
NetC3_2: C3.2 U2.22 | length 1.3
  Top Layer w0.254: U2.22 C3.2@8.791,21.77
NetC7_2: C7.2 R1.1 U4.9 | length 2.7
  Top Layer w0.305: R1.1 42.299,4.834 C7.2 42.943,5.478 U4.9
NetC11_1: C11.1 R9.1 U6.35 | length 2.5
  Top Layer w0.152: U6.35 22.435,39.834 v2(22.733,40.132)
  Bottom Layer w0.152: R9.1 22.598,39.878 22.606,39.886
NetC15_2: C15.2 R17.2 R29.2 SW1.1 | length 3.3
  Top Layer w0.305: SW1.1@26.797,4.314 R17.2 R29.2
NetC16_2: C16.2 U6.40 | length 2
  Top Layer w0.152: v2(19.558,40.615) 19.558,40.132 19.935,39.755 U6.40
NetC18_2: C18.2 U6.37 | length 0.8
  Top Layer w0.152: U6.37 21.435,39.596 v2(21.463,39.624)
NetC19_1: C19.1 R3.1 R19.2 | length 32.6
  Top Layer w0.254: C19.1 27.864,33.909 v2(27.94,33.833) ; v2(30.531,5.715) 31.758,5.715 R3.1
  Bottom Layer w0.254: v2(27.94,33.833) 30.531,31.242 v2(30.531,5.715)
NetC19_2: C19.2 U6.25 | length 1.7
  Top Layer w0.152: U6.25 24.569,34.54 25.2,33.909 C19.2
NetC20_2: C20.2 U6.31 | length 1.2
  Top Layer w0.152: U6.31 24.738,37.54 25.044,37.846 C20.2@25.281,37.846
NetC22_2: C22.2 R10.1 | length 1
  Top Layer w0.152: C22.2 R10.1
NetC24_1: C24.1 U6.26 | length 2.1
  Top Layer w0.152: U6.26 25.031,35.04 25.146,34.925 25.07,34.849 v2(25.07,34.722)
  Bottom Layer w0.152: C24.1 v2@25.019,34.925
NetC25_2: C25.2 U6.29 | length 0.5
  Top Layer w0.152: U6.29 v2(24.729,36.54)
NetC26_2: C26.2 U6.32 | length 0.7
  Top Layer w0.152: U6.32 24.185,38.282 v2(24.511,38.608)
NetC27_1: C27.1 C28.1 U6.42 | length 3.6
  Top Layer w0.152: C27.1 18.267,42.151 18.267,40.796 C28.1 ; C28.1@18.902,40.246 18.918,40.23 18.918,39.277 18.902,39.261 18.902,38.823 U6.42
NetC28_2: C28.2 R11.1 | length 1.1
  Top Layer w0.152: C28.2 19.177,41.648 R11.1@19.177,42.172
NetC31_1: C31.1 U6.12 | length 1.9
  Top Layer w0.254: U6.12 21.435,29.365 22.225,28.575 C31.1
NetC34_2: C34.2 R35.2 U7.1 U7.3 | length 7.4
  Top Layer w0.254: R35.2 30.546,32.585 U7.1 30.546,35.575 30.937,35.966 32.207,35.966 32.461,35.712 U7.3
NetC44_1: C44.1 R18.1 U6.41 | length 1.3
  Top Layer w0.152: U6.41 v2(19.435,39.48)
  Bottom Layer w0.152: C44.1 19.347,38.541 R18.1
NetC47_1: C47.1 U6.36 | length 3.7
  Top Layer w0.152: C47.1 21.935,42.335 21.935,41.068 21.873,41.006 21.873,40.63 21.935,40.568 21.935,39.834 21.946,39.824 21.946,39.424 21.935,39.414 U6.36
NetC47_2: C47.2 R27.1 R30.2 R32.1 | length 12.7
  Top Layer w0.381: C47.2 22.86,43.426 R30.2@22.86,43.061 ; R32.1 22.86,42.045 R30.2@22.86,43.061 ; R27.1 25.273,44.196 24.384,43.307 23.106,43.307 R30.2@22.86,43.061
NetC49_1: C49.1 R13.1 U1.1 U2.2 | length 20.5
  Top Layer w0.254: U2.2 15.864,14.768 v2(16.18,14.453) ; v2(24.384,9.703) U1.1@25.801,9.703
  Top Layer w0.381: C49.1 U1.1@25.773,9.675 ; U1.1@25.847,10.302 26.476,10.931 R13.1@28.829,10.931
  Bottom Layer w0.254: v2(16.18,14.453) 23.165,14.453 23.825,13.792 23.825,10.262 v2(24.384,9.703)
NetC50_1: C50.1 R17.1 U1.2 U2.3 | length 19.5
  Top Layer w0.254: U2.3 15.928,15.268 v2(16.18,15.519)
  Top Layer w0.381: R17.1 v2(26.797,8.941) U1.2
  Bottom Layer w0.254: v2(16.18,15.519) 16.586,15.113 23.571,15.113 26.797,11.887 v2(26.797,8.941)
NetC93_1: C93.1 U6.11 | length 1.5
  Top Layer w0.254: C93.1@20.935,28.329 U6.11
NetD1_2: D1.2 R7.1 | length 1.5
  Top Layer w0.152: R7.1@34.454,21.492 D1.2
NetE1_1: E1.1 L1.2 U4.11 | length 4.4
  Top Layer w0.305: E1.1 45.143,2.852 U4.11
NetL1_1: L1.1 R1.2 | length 0.8
  Top Layer w0.305: R1.2 L1.1
NetLED1_1: LED1.1 R31.2 | length 1.2
  Top Layer w0.254: LED1.1 R31.2
NetLED4_1: LED4.1 R14.2 | length 1
  Top Layer w0.152: LED4.1 R14.2
NetP3_1: P3.1 R33.1 | length 1.3
  Top Layer w0.381: P3.1 R33.1@19.528,6.773
NetP3_5: P3.5 R34.2 | length 1.3
  Top Layer w0.381: P3.5@22.128,5.469 R34.2@22.128,6.773
NetQ1_1: Q1.1 U2.39 | length 3.4
  Top Layer w0.254: Q1.1 6.987,11.811 8.001,11.811 8.791,12.601 U2.39
NetQ1_2: Q1.2 SW5.1 U2.40 | length 12.4
  Top Layer w0.254: Q1.2 Q1.2@6.864,10.099 ; U2.40 9.291,12.526 Q1.2@6.864,10.099 ; SW5.1 9.892,5.062 8.712,6.242 8.712,9.347 7.96,10.099 Q1.2@6.864,10.099
NetQ1_3: Q1.3 R16.1 U3.3 | length 4.4
  Top Layer w0.254: U3.3 10.498,8.712 R16.1
  Top Layer w0.305: Q1.3 10.114,9.884 U3.3
NetR2_2: R2.2 R7.2 U4.22 | length 2.6
  Top Layer w0.152: U4.22 34.443,20.421 35.28,20.421 R2.2
NetR3_2: R3.2 R31.1 U4.3 | length 2.9
  Top Layer w0.254: R3.2 34.298,5.08 R31.1 34.443,5.225 U4.3
NetR8_2: R8.2 R13.2 U1.4 U5.3 | length 8.4
  Top Layer w0.152: R13.2 29.634,11.93 30.81,13.106 30.81,15.24 30.437,15.613 R8.2
  Top Layer w0.305: U5.3 28.883,15.613 R8.2
  Top Layer w0.381: U1.4 28.202,11.93 R13.2
NetR12_1: R12.1 X1.1 | length 1.6
  Top Layer w0.152: R12.1@27.178,42.156 27.662,42.156 X1.1
NetR15_1: R15.1 U6.56 | length 1.8
  Top Layer w0.254: R15.1 14.085,34.54 U6.56
NetR20_1: R20.1 U6.55 | length 1.8
  Top Layer w0.254: R20.1 13.581,35.408 13.949,35.04 U6.55
NetR21_1: R21.1 U6.53 | length 1.9
  Top Layer w0.254: v2(14.478,35.941) 14.577,36.04 U6.53
  Bottom Layer w0.254: R21.1 13.97,35.433 v2(14.478,35.941)
NetR22_1: R22.1 U6.51 | length 2.5
  Top Layer w0.254: v2(14.478,37.338) 14.776,37.04 U6.51
  Bottom Layer w0.381: R22.1 v2(14.478,37.338)
NetR23_1: R23.1 SW5.2 | length 4.6
  Top Layer w0.305: SW5.2 15.367,2.798 15.367,5.596 R23.1
NetR24_1: R24.1 U6.48 | length 0.8
  Top Layer w0.381: R24.1@15.494,39.7 15.494,39.442 U6.48@15.869,39.067
NetR25_1: R25.1 U6.49 | length 1.2
  Top Layer w0.381: R25.1@14.169,38.937 U6.49@14.996,38.11
NetR26_1: R26.1 U6.39 | length 1.7
  Top Layer w0.152: U6.39 R26.1@20.435,40.521
NetR27_2: R27.2 X2.3 | length 1.2
  Top Layer w0.305: R27.2 X2.3
NetR28_1: R28.1 SW1.2 | length 1.5
  Top Layer w0.305: SW1.2 31.5,2.167 R28.1
NetR37_1: R37.1 U2.44 | length 1.3
  Top Layer w0.254: R37.1@11.291,12.299 U2.44
NetR38_2: R38.2 U2.7 | length 1.4
  Top Layer w0.254: U2.7 R38.2@15.355,17.268
NetU2_10: U2.10 U4.21 | length 23.9
  Top Layer w0.254: U2.10 15.827,18.768 v2(16.231,18.364) ; v2(28.626,17.45) 30.937,17.45 31.572,16.815 35.027,16.815 35.543,17.331 U4.21
  Bottom Layer w0.254: v2(16.231,18.364) 27.711,18.364 v2(28.626,17.45)
NetU2_11: U2.11 U4.20 | length 26.4
  Top Layer w0.254: U2.11 15.153,19.268 v2(15.392,19.507) ; v2(29.743,16.764) 30.124,16.383 35.941,16.383 36.643,17.085 U4.20
  Bottom Layer w0.254: v2(15.392,19.507) 27.788,19.507 29.743,17.551 v2(29.743,16.764)
NetU2_13: U2.13 U6.44 | length 23.9
  Top Layer w0.152: U2.13 13.291,21.394 13.652,21.755 v2(13.652,25.717) ; v2(17.907,40.259) 17.935,40.231 U6.44
  Bottom Layer w0.152: v2(13.652,25.717) 13.652,27.572 17.145,31.064 17.145,36.271 17.417,36.544 17.976,36.544 18.339,36.906 18.339,38.075 17.818,38.595 17.818,40.17 v2(17.907,40.259)
NetU2_14: U2.14 U6.33 | length 31.1
  Top Layer w0.152: U2.14 v2@12.791,22.443 ; U6.33 23.435,39.132 23.546,39.243 v2(23.901,39.243)
  Bottom Layer w0.152: v2(12.852,22.504) 14.068,21.289 18.622,21.289 23.901,26.568 23.901,30.405 26.035,32.538 26.035,36.119 24.663,37.49 24.46,37.49 23.901,38.049 23.901,38.583 ; 23.901,38.608 v2(23.901,39.243)
NetU2_15: U2.15 U6.45 | length 25.6
  Top Layer w0.152: U2.15 12.291,27.099 v2(12.319,27.071) ; U6.45 17.424,38.801 17.424,40.538 17.78,40.894 v2(17.78,41.021)
  Bottom Layer w0.152: v2@12.268,27.051 15.265,30.048 15.265,35.312 16.497,36.544 16.915,36.544 17.418,37.046 17.418,40.659 v2(17.78,41.021)
NetU2_16: U2.16 U6.62 | length 14.2
  Top Layer w0.152: U2.16 v2@11.791,29.281 ; v2(14.326,32.233) 14.326,31.852 14.637,31.54 U6.62
  Bottom Layer w0.152: v2(11.735,29.337) 14.326,31.928 v2(14.326,32.233)
NetU2_17: U2.17 U6.46 | length 22.9
  Top Layer w0.152: v2(11.278,26.848) 11.291,26.834 U2.17 ; U6.46 v2(16.935,39.707)
  Bottom Layer w0.152: v2@11.278,26.822 11.328,26.822 14.961,30.455 14.961,35.438 16.371,36.848 16.789,36.848 17.091,37.15 17.091,39.551 v2(16.935,39.707)
NetU2_18: U2.18 U6.63 | length 13
  Top Layer w0.152: v2(10.77,25.756) 10.77,23.8 10.922,23.647 10.922,21.59 10.791,21.459 U2.18
  Top Layer w0.254: v2(14.428,31.04) U6.63
  Bottom Layer w0.152: v2(10.77,25.756) 10.77,27.381 v2(14.428,31.04)
NetU2_19: U2.19 U6.6 | length 17
  Top Layer w0.152: U2.19 v2@10.291,23.067 ; v2(18.435,23.667) U6.6
  Bottom Layer w0.152: v2(10.363,23.139) 10.891,23.667 v2(18.435,23.667)
NetU2_20: U2.20 U6.27 | length 30.1
  Top Layer w0.152: v2(9.754,25.019) 9.791,24.982 U2.20 ; U6.27 24.872,35.54 v2(24.892,35.56)
  Bottom Layer w0.152: v2(9.754,25.019) 21.793,25.019 23.597,26.822 23.597,30.531 25.73,32.664 25.73,35.204 25.375,35.56 v2(24.892,35.56)
PA11: U2.32
PA12: U2.33
PA13: P3.3 U2.34 | length 28.6
  Top Layer w0.254: v2(5.842,16.078) 5.842,15.973 6.547,15.268 U2.34 ; v2(20.803,3.988) P3.3@20.803,5.444
  Bottom Layer w0.254: v2(5.842,16.078) 5.842,13.233 7.01,12.065 7.01,6.02 9.423,3.607 20.422,3.607 v2(20.803,3.988)
PA14: P3.2 U2.37 | length 21.9
  Top Layer w0.254: v2(7.791,12.388) U2.37 ; v2(19.71,4.242) 20.178,4.709 P3.2
  Bottom Layer w0.254: v2(7.791,12.388) 7.791,5.823 9.601,4.013 19.482,4.013 v2(19.71,4.242)
pwm: U2.46
REF_IN: C17.2 R6.1 U6.28 | length 2.3
  Top Layer w0.152: U6.28 24.185,36.043 25.417,36.043 25.654,35.806
  Top Layer w0.254: R6.1@25.908,35.806 C17.2@26.67,35.806
TCXO: C20.1 R5.2 X1.3 | length 5.5
  Top Layer w0.152: C20.1 26.289,37.965 27.305,37.965 28.821,37.965 29.464,38.608 29.464,39.608 X1.3
VTUNE: C29.1 R4.2 X2.1 | length 2.4
  Top Layer w0.254: X2.1 44.95,39.116 ; R4.2 44.95,39.116 ; C29.1 45.339,39.505 44.95,39.116
VTUNE1: C21.1 C22.1 R4.1 U6.34 | length 28.3
  Top Layer w0.152: U6.34 22.935,39.652 C21.1@23.63,40.347 ; C21.1@23.63,40.496 C21.1 ; 24.638,39.37 24.638,39.243 ; C22.1 25.408,39.091 24.79,39.091 24.638,39.243 ; R4.1 34.504,37.727 32.691,39.541 32.499,39.541 30.688,41.351 24.43,41.351 23.63,40.551 C21.1 ; C21.1@23.63,40.347 23.63,40.251 24.638,39.243 ; C21.1@23.63,40.347 C21.1
pads on no net: P3.4 SW1.3 SW1.4 SW5.3 SW5.4 U2.4 U2.5 U2.6 U2.12 U2.21 U2.25 U2.26 U2.29 U2.30 U2.31 U2.38 U2.41 U2.42 U2.43 U2.45 U3.4 U4.1 U4.2 U4.4 U4.5 U4.6 U4.7 U4.8 U4.14 U4.15 U4.16 U4.17 U4.18 U4.19 U5.4 U6.1 U6.2 U6.3 U6.4 U6.5 U6.7 U6.8 U6.9 U6.13 U6.14 U6.15 U6.16 U6.19 U6.20 U6.21 U6.22 U6.50 U6.54 U6.58 U6.59 U6.60 U6.61 U7.4 U8.4 U9.4 U10.4 U11.4

## Polygon pours and split planes (outlines as drawn)
GND on Top Layer "GND_L01_P003" (solid, remove dead copper, pour order 3): 4.064,24.511 0,31.623 0,37.832 4.203,45.092 5.334,45.72 12.828,50.19 47.371,50.19 47.371,-0.254 5.08,-0.254 5.08,22.86
NetP3_5 on Top Layer "NETP3_5_L01_P000" (solid, remove dead copper, pour order 0): 17.17,6.325 23.698,6.325 25.451,4.572 25.451,1.295 15.748,1.295 15.621,1.422 15.621,4.572
GND on Internal Plane 1 (split plane): 46.861,0.256 5.59,0.256 5.59,22.86 5.586,22.9 5.584,22.941 5.582,22.95 5.581,22.96 5.569,22.998 5.559,23.038 5.554,23.046 5.552,23.055 5.532,23.091 5.515,23.128 4.503,24.771 0.51,31.759 0.51,37.709 4.562,44.707 5.582,45.274 5.588,45.278 5.595,45.282 12.969,49.68 46.861,49.68
3.3VCXO on Internal Plane 2 (split plane): 35.867,36.342 24.771,36.342 17.956,43.157 17.956,44.706 35.867,44.706
3.3PLL on Internal Plane 2 (split plane): 24.489,35.912 24.541,35.872 24.602,35.846 24.667,35.838 28.12,35.838 28.12,26.389 17.956,26.389 17.956,42.444
3.3CLKOUT on Internal Plane 2 (split plane): 17.452,43.053 17.452,26.389 12.774,26.389 12.774,44.706 17.452,44.706
GND on Internal Plane 2 (split plane): 46.861,0.256 5.59,0.256 5.59,22.86 5.586,22.9 5.584,22.941 5.582,22.95 5.581,22.96 5.569,22.998 5.559,23.038 5.554,23.046 5.552,23.055 5.532,23.091 5.515,23.128 4.503,24.771 0.51,31.759 0.51,37.709 4.562,44.707 5.582,45.274 5.588,45.278 5.595,45.282 12.969,49.68 46.861,49.68

## Keep-outs
Keep-Out Layer:
  lines w0.5: 0,31.623 0,31.877 0,37.832 4.203,45.092 5.334,45.72 12.488,49.987 47.371,49.987 47.371,-0.254 5.08,-0.254 5.08,22.86 4.064,24.511 0,31.623

## Other copper
Internal Plane 2 (plane layer: these items are gaps in the copper):
  lines w0.5: 28.372,36.09 28.372,26.137 17.704,26.137 ; 17.704,26.137 12.522,26.137 12.522,44.958 17.704,44.958 ; 17.704,26.137 17.704,44.958 ; 17.704,44.958 17.704,43.053 24.667,36.09 36.119,36.09 36.119,44.958 17.704,44.958

## Text inside footprints (layer, text, board x,y; h text height)
U6: Top Overlay "*" at 12.446,30.099 h1.52 r270